# Altium PCB PCB-Converter-RFM95W.PcbDoc
Units mm, origin at the board's own origin, x right, y up, seen from the top; angles counter-clockwise.
Board outline 28 x 25.61 mm, 2 copper layers (Top Layer, Bottom Layer), stack 1.569 mm thick; 4 components, 14 nets, 36 pads, 0 vias.
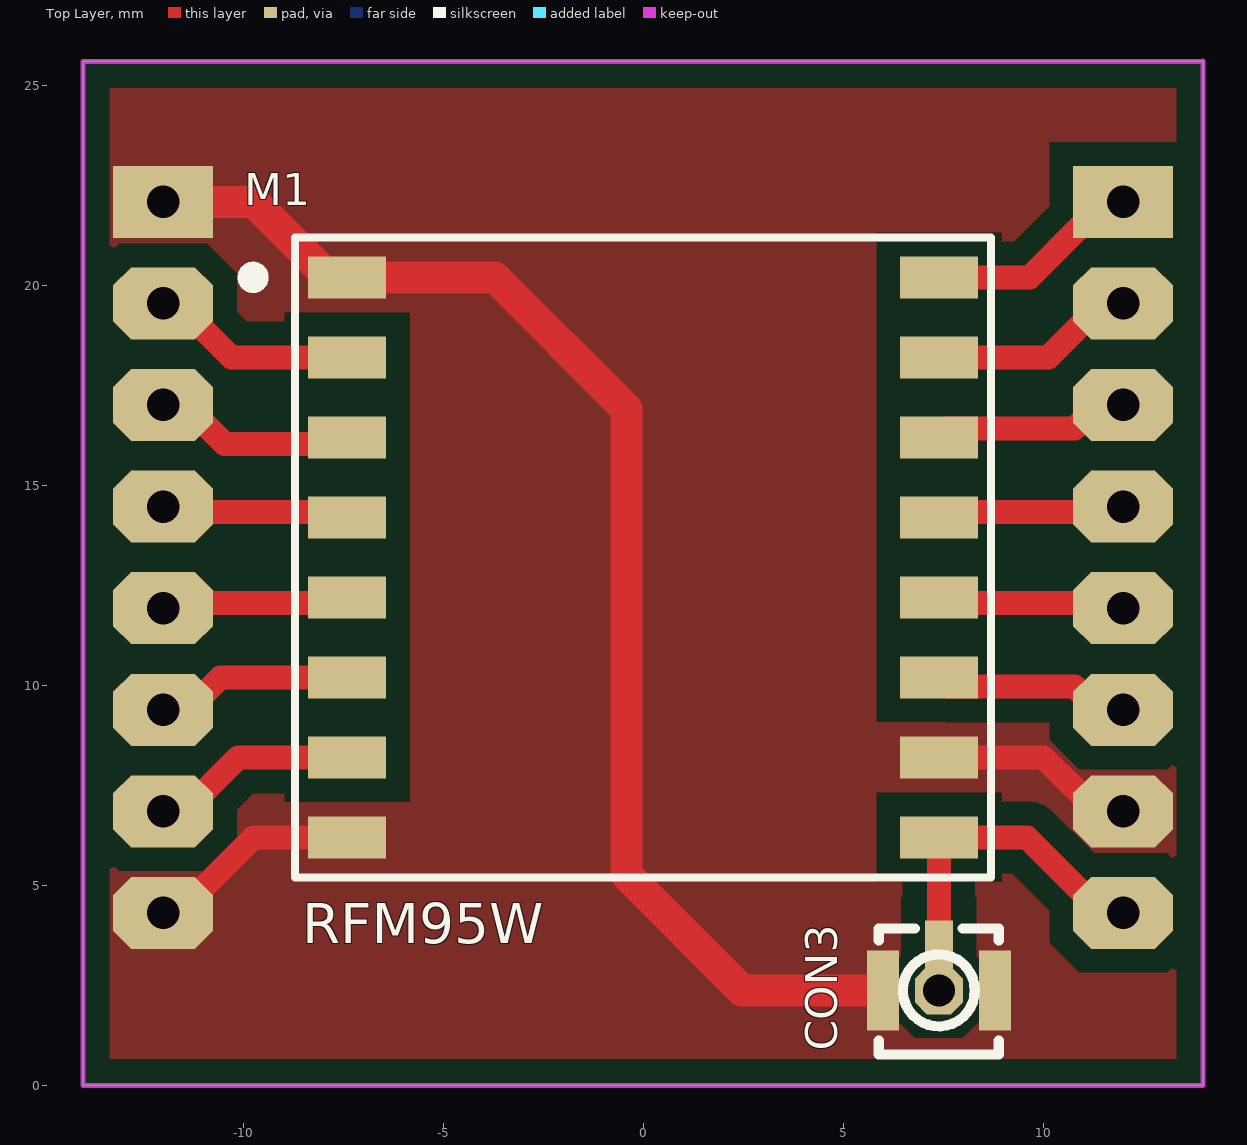
[diagram p0: Top Layer view]
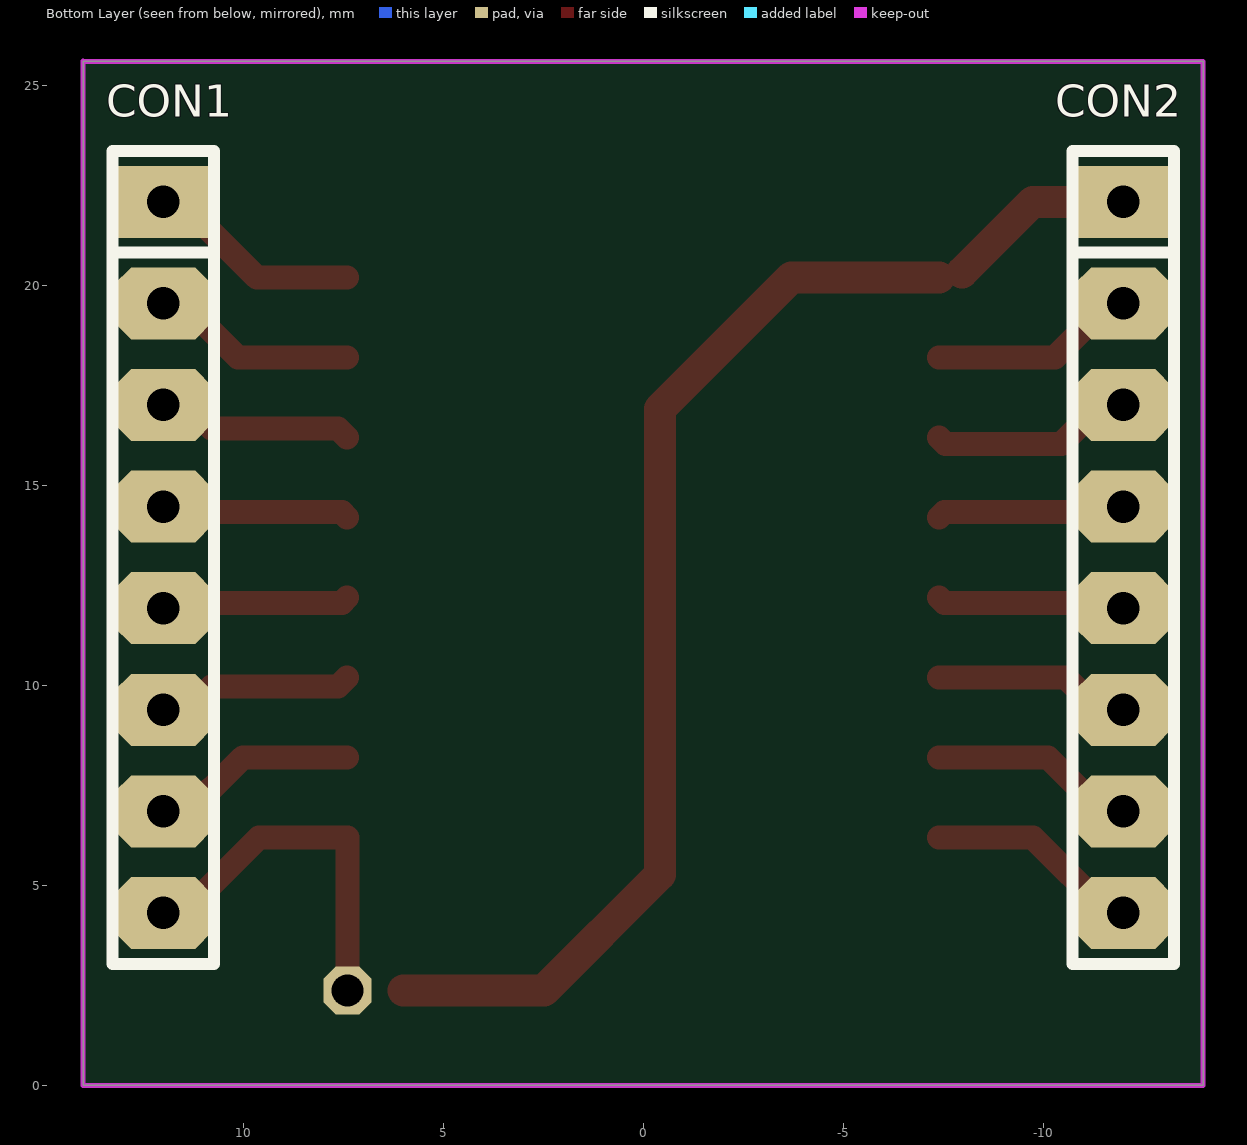
[diagram p1: Bottom Layer view, seen from below]

## Layer stack, top to bottom
Top Solder: solder mask 0.0102, Solder Resist, Dk 3.5
Top Layer: signal copper 0.035
Dielectric 1: core 1.4986, Core-043, Dk 4.3
Bottom Layer: signal copper 0.035
Bottom Solder: solder mask 0.0102, Solder Resist, Dk 3.5

## Board outline
-13.999,0 -13.999,25.6 14,25.6 14.001,25.606 14.001,0

## Design rules (kind name [scope] priority, off if disabled: settings)
Clearance [All] p1: gap=0.254 ignorepadtopadclearanceinfootprint=FALSE except(0: Arc-Hole Track-Hole SMDPad-Hole THPad-Hole Via-Hole Fill-Hole Poly-Hole Region-Hole Text-Hole; 0.2: Arc-Track Arc-SMDPad Track-Track Track-SMDPad SMDPad-SMDPad; 0.6: Arc-Poly Track-Poly SMDPad-Poly THPad-Poly Via-Poly Fill-Poly Poly-Poly)
ComponentClearance [All] p1 off: gap=0.254 collisioncheckmode=3 verticalgap=0.254 showdistances=FALSE
Height [All] p1 off: minheight=0 maxheight=25.4 prefheight=12.7
PolygonConnect [All] p1: connectstyle=Direct reliefconductorwidth=0.254 reliefentries=4 polygonreliefangle="90 Angle" airgapwidth=0.254
RoomDefinition PCB-Converter-RFM95W [InComponentClass('PCB-Converter-RFM95W')] p1: confinementstyle=ConfineIn formatcopy=TRUE lockcomponents=FALSE outline -14.41,0.054 14.13,0.054 14.13,25.96 -14.41,25.96
RoutingVias [All] p1: holewidth=0.4 width=0.7 viastyle="Through Hole" minholewidth=0.2 minwidth=0.4 maxholewidth=0.8 maxwidth=1.27
SolderMaskExpansion [All] p1: expansion=0.102 istentingtop=FALSE
Width [All] p1: maxlimit=1 minlimit=0.2 preferedwidth=0.6
28 further rules are at their usual default settings.

## Components (designator, comment, footprint, x,y, rotation, side; value= is the part's Value field where it differs from the comment)
CON1 "HEADER 8" "SIP 3D 8" 12,13.2 r270 bottom
CON2 "HEADER 8" "SIP 3D 8" -12,13.2 r270 bottom
CON3 "IPEX ANT" "IPEX ANT" 7.393,2.374 r180 top
M1 "RFM95W" "LoRa RFM95W" 0,13.2 r0 top

## Footprints (in the part's own frame and the unit in brackets; to place one, negate y for a bottom-side part, rotate by r counter-clockwise, add the part's x,y. Pads: shape width x height; smd on the part's side, far side on the other; paste and mask are expansions set on the pad)
"IPEX ANT" [mm]
  oct 1.2x1.2 hole 0.8: 1(0,0)
  rect 0.7x1.2 smd: 1(0,-1.15)
  rect 0.8x2 smd: 2(1.4,0) 3(-1.4,0)
  silkscreen extent -1.5,-1.55 1.5,1.6, body extent -1.5,-1.55 1.5,1.55, height 1.25
"LoRa RFM95W" [mm]
  rect 1.95x1.05 smd: 1(-7.4,7) 2(-7.4,5) 3(-7.4,3) 4(-7.4,1) 5(-7.4,-1) 6(-7.4,-3) 7(-7.4,-5) 8(-7.4,-7) 9(7.4,-7) 10(7.4,-5) 11(7.4,-3) 12(7.4,-1) 13(7.4,1) 14(7.4,3) 15(7.4,5) 16(7.4,7)
  silkscreen extent -10.04,-8 8.7,8, body extent -8,-7.95 8,7.95, height 2.23
"SIP 3D 8" [mm]
  rect 1.8x2.5 hole 0.813: 1(-8.89,0)
  oct 1.8x2.5 hole 0.813: 2(-6.35,0) 3(-3.81,0) 4(-1.27,0) 5(1.27,0) 6(3.81,0) 7(6.35,0) 8(8.89,0)
  silkscreen extent -10.16,-1.27 10.16,1.27, body extent -10.16,-1.27 10.16,1.27, height 8.2

## Part data
CON3: "SMD Male Connector IPEX Antenna IPX 20279-001E"
M1: library part "LoRa RFM95W", "HOPERF LoRa RFM95W"

## Nets (pads, with @x,y where several pads share a name; then routed paths per layer and width w, separated by ;. In a path a pad name is that pad's centre, name@x,y a point inside that pad or via, vN(x,y) a via of type N, cw(c..) or ccw(c..) an arc to the next point about the centre after c; other vN are vias at no path point)
1: CON1.7 CON2.1 CON2.8 CON3.2 CON3.3 M1.1 M1.8 M1.10 | length 42.9
  Top Layer w0.6: CON2.8 -11.63,4.31 -9.74,6.2 M1.8 ; M1.10 10.01,8.2 10.794,7.416 10.809,7.416 11.376,6.85 CON1.7
  Top Layer w0.8: CON2.1 -9.74,22.09 M1.1@-7.975,20.325 ; M1.1 -3.71,20.2 -0.416,16.906 -0.416,5.266 2.476,2.374 CON3.2
2: CON2.2 M1.2 | length 5.2
  Top Layer w0.6: CON2.2 -11.64,19.55 -10.29,18.2 M1.2
3: CON2.3 M1.3 | length 5.1
  Top Layer w0.6: CON2.3 -11.43,17.01 -10.46,16.04 -7.56,16.04 M1.3
4: CON2.4 M1.4 | length 4.7
  Top Layer w0.6: CON2.4 -11.865,14.335 -7.535,14.335 M1.4
5: CON2.5 M1.5 | length 4.7
  Top Layer w0.6: CON2.5 -11.865,12.065 -7.535,12.065 M1.5
6: CON2.6 M1.6 | length 4.9
  Top Layer w0.6: CON2.6 -11.376,9.39 -10.566,10.2 M1.6
7: CON2.7 M1.7 | length 5.2
  Top Layer w0.6: CON2.7 -11.47,6.85 -10.12,8.2 M1.7
9: CON1.8 CON3.1 M1.9 | length 9.2
  Top Layer w0.6: CON3.1@7.393,2.374 7.393,3.524 7.393,6.193 M1.9 9.6,6.2 11.49,4.31 CON1.8
11: CON1.6 M1.11 | length 4.9
  Top Layer w0.6: M1.11 7.625,9.975 10.791,9.975 11.376,9.39 CON1.6
12: CON1.5 M1.12 | length 4.7
  Top Layer w0.6: M1.12 7.535,12.065 11.865,12.065 CON1.5
13: CON1.4 M1.13 | length 4.7
  Top Layer w0.6: M1.13 7.535,14.335 11.865,14.335 CON1.4
14: CON1.3 M1.14 | length 4.9
  Top Layer w0.6: M1.14 7.625,16.425 10.791,16.425 11.376,17.01 CON1.3
15: CON1.2 M1.15 | length 5.2
  Top Layer w0.6: M1.15 10.13,18.2 11.48,19.55 CON1.2
16: CON1.1 M1.16 | length 5.4
  Top Layer w0.6: M1.16 9.66,20.2 10.95,21.49 11.4,21.49 CON1.1

## Polygon pours and split planes (outlines as drawn)
1 on Top Layer "NONET_L01_P-001" (solid, remove dead copper, pour order 0): -14,25.6 14,25.6 14,0 -14,0

## Keep-outs
Keep-Out Layer:
  lines w0.127: 14,25.6 -13.999,25.6 -13.999,0 14.001,0 14.001,25.606

## Silkscreen, mask and mechanical layers (free items; w line width, h text height)
Top Overlay:
  text "RFM95W" at -8.52,3.55 h1